# Altium PCB 60V_Ind.PcbDoc
Units mil, origin at the board's own origin, x right, y up, seen from the top; angles counter-clockwise.
Board outline 1600 x 800 mil, 2 copper layers (Top Layer, Bottom Layer), stack 58.8 mil thick; 7 components, 4 nets, 17 pads, 0 vias.
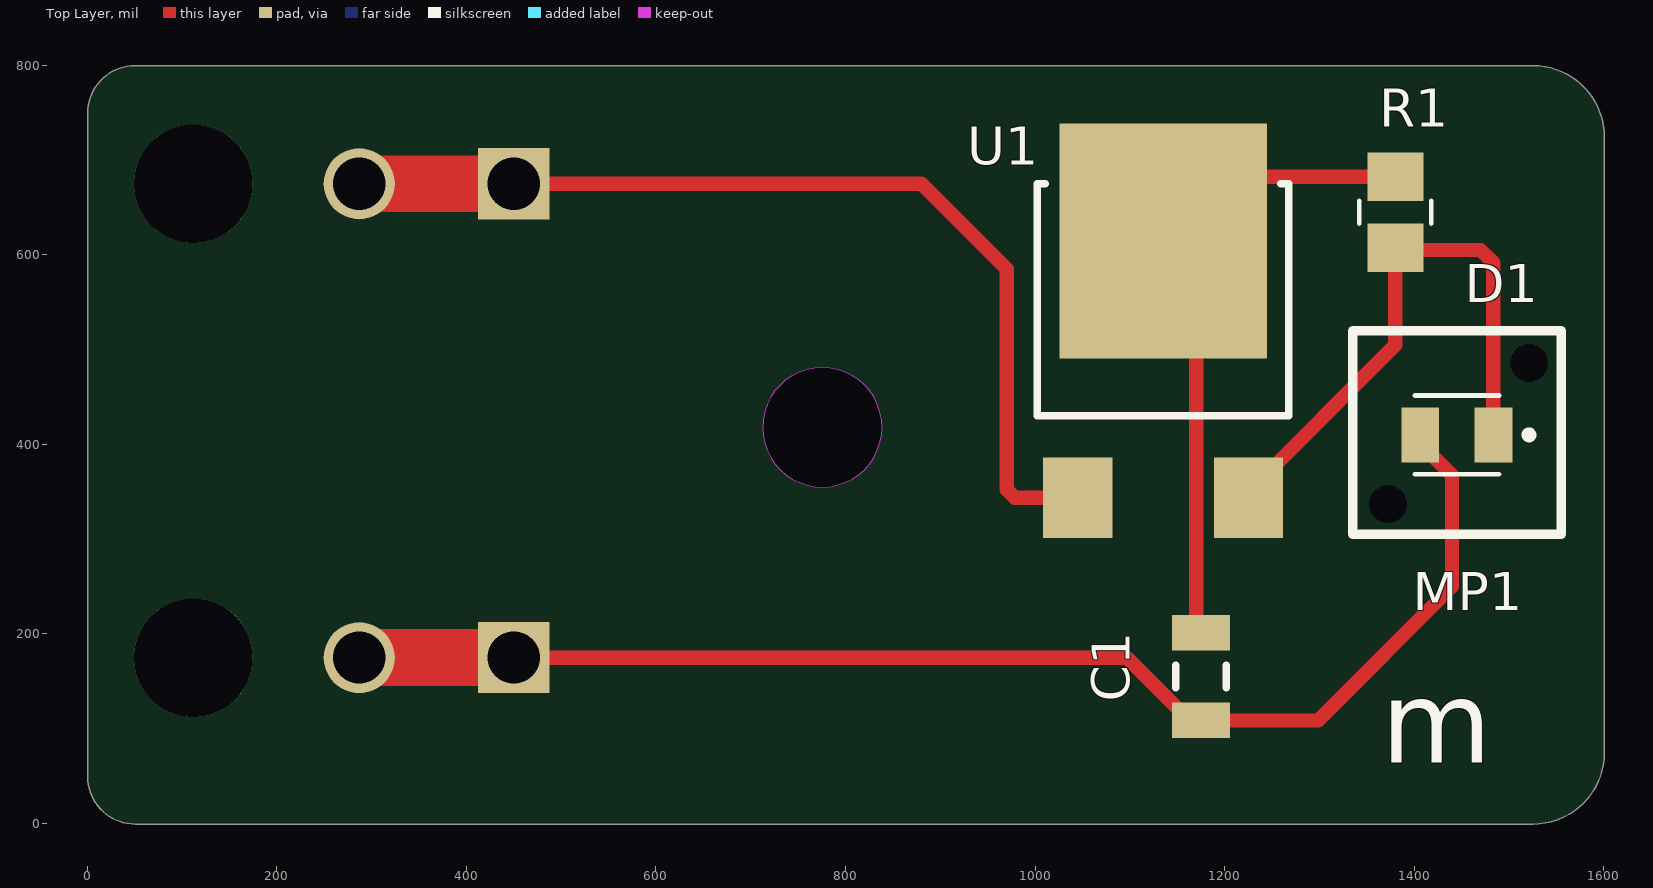
[diagram p0: Top Layer view]
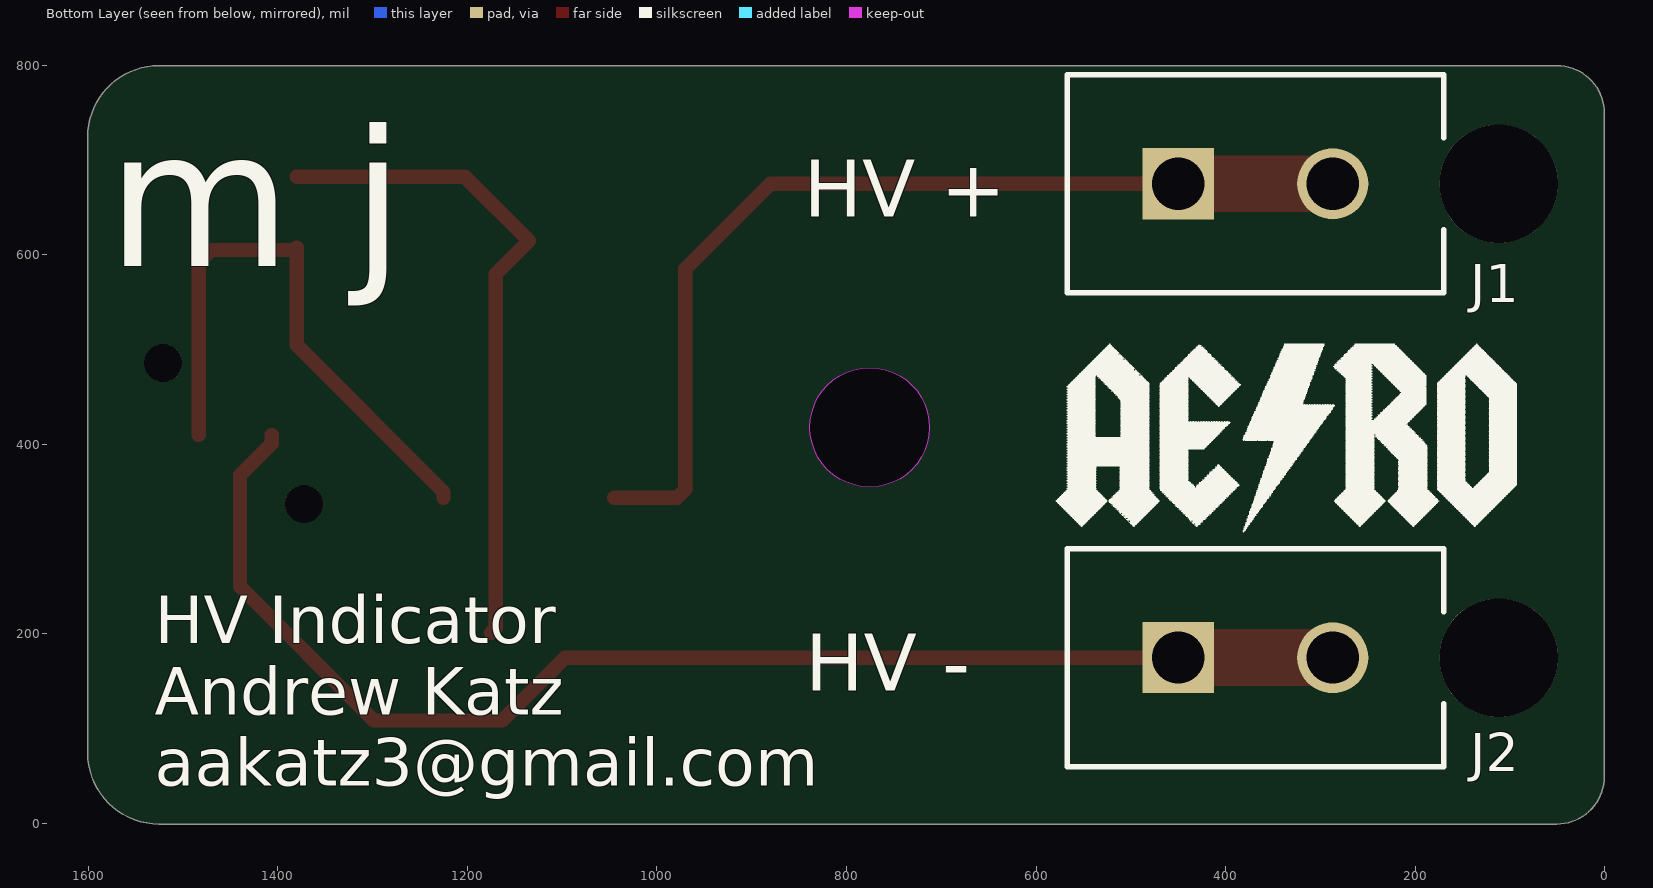
[diagram p1: Bottom Layer view, seen from below]
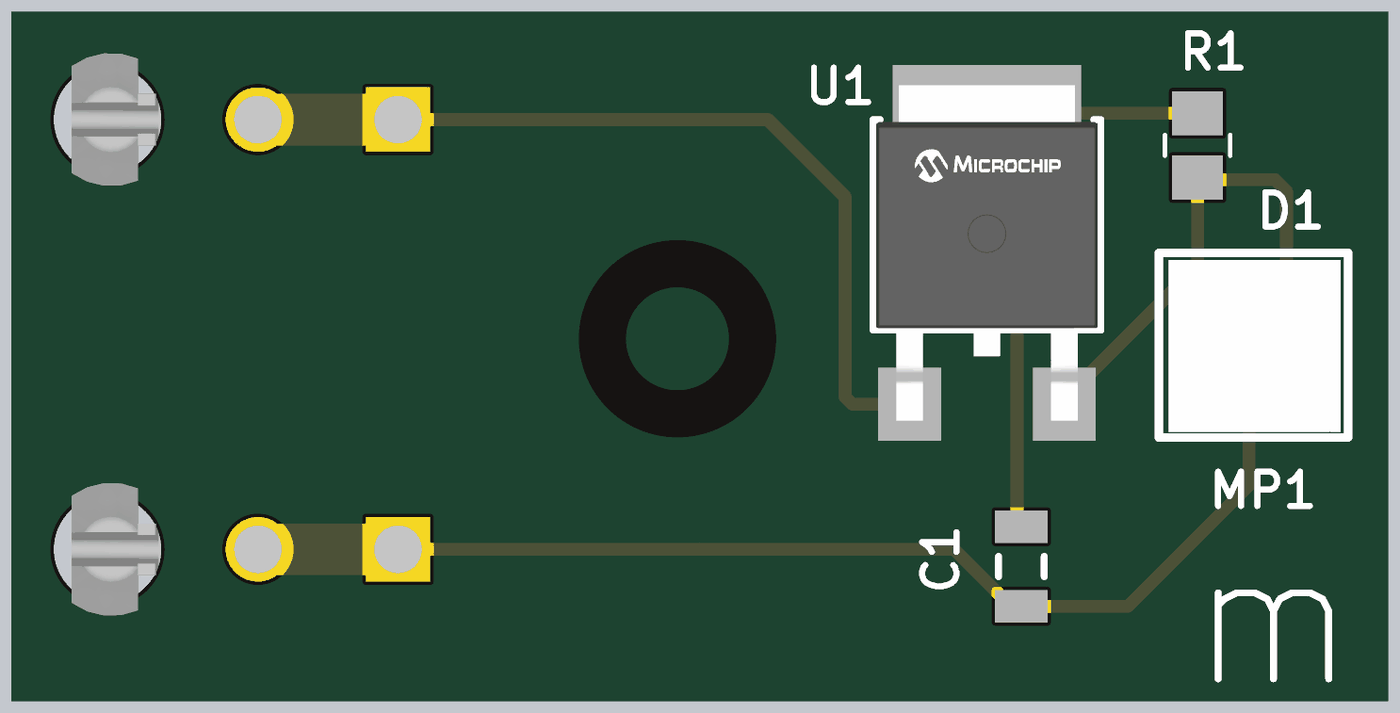
[diagram p2: 3D render of the assembled board from above, using the file's embedded part models]

## Layer stack, top to bottom
Top Solder: solder mask 1, SM-001, Dk 4
Top Layer: signal copper 1.4
Dielectric 1: core 56, FR-4, Dk 4.2
Bottom Layer: signal copper 1.4
Bottom Solder: solder mask 1, SM-001, Dk 4

## Board outline
50.5,-0.5 cw(c50.5,49.5) 0.5,49.5 0.5,749.5 cw(c50.5,749.5) 50.5,799.5 1525.5,799.5 cw(c1525.5,724.5) 1600.5,724.5 1600.5,74.5 cw(c1525.5,74.5) 1525.5,-0.5
cut-out: 712.51,418.01 ccw(c775.5,418.01) 775.5,355.02 ccw(c775.5,418.01) 838.49,418.01 ccw(c775.5,418.01) 775.5,481 ccw(c775.5,418.01)

## Design rules (kind name [scope] priority, off if disabled: settings)
Clearance [All] p1: gap=10 ignorepadtopadclearanceinfootprint=FALSE except(0: Arc-Hole Track-Hole SMDPad-Hole THPad-Hole Via-Hole Fill-Hole Poly-Hole Region-Hole Text-Hole)
ComponentClearance [All] p1: gap=3 collisioncheckmode=3 verticalgap=2 showdistances=TRUE
HoleSize [All] p1: absolutevalues=TRUE maxlimit=500 minlimit=1 maxpercent=80.000 minpercent=20.000
PasteMaskExpansion PasteMaskExpansion_1 [IsVia or IsThruPin] p1: expansion=-1000
PasteMaskExpansion [Not IsVia and Not IsThruPin] p2: expansion=0
PolygonConnect [All] p1: connectstyle=Relief reliefconductorwidth=10 reliefentries=4 polygonreliefangle="90 Angle" airgapwidth=10
RoutingVias [All] p1: holewidth=28 width=50 viastyle="Through Hole" minholewidth=15 minwidth=30 maxholewidth=28 maxwidth=50
SilkToSilkClearance [All] p1: silktosilkclearance=5
SilkToSolderMaskClearance [IsPad] p1: minsilkscreentomaskgap=5 clearancetoexposedcopper=TRUE
SolderMaskExpansion via [IsVia] p1: expansion=4 istentingtop=TRUE
SolderMaskExpansion [All] p2: expansion=4 istentingtop=FALSE
Width [All] p1: maxlimit=60 minlimit=10 preferedwidth=10 minimp=50.000000 maximp=50.000000 favimp=50.000000
25 further rules are at their usual default settings.

## Components (designator, comment, footprint, x,y, rotation, side; value= is the part's Value field where it differs from the comment)
C1 "C2012X7S2A105K125AB" CAPC2013X145X20ML20 1175,155 r270 top
D1 "SM0805HCL" LEDC2012X135N_SM0805UGC(Primary) 1445,410 r180 top
J1 "1-770872-0" CON2_1X2_P163_VM 450,675 r180 bottom value=Value
J2 "1-770872-0" CON2_1X2_P163_VM 450,175 r180 bottom value=Value
MP1 "LPA-C011301S-10" LPA-C011301S-10 1450,415 r0 top
R1 "40.2 Ohms" 0805_RES 1380,645 r90 top value=40.2
U1 "LR8K4-G" Microchip_C04-189_MFG 1135,520 r0 top

## Footprints (in the part's own frame and the unit in brackets; to place one, negate y for a bottom-side part, rotate by r counter-clockwise, add the part's x,y. Pads: shape width x height; smd on the part's side, far side on the other; paste and mask are expansions set on the pad)
0805_RES [mm]
  rect 1.3x1.5 smd: 1(-0.95,0) 2(0.95,0)
  silkscreen extent -0.3,-0.97 0.3,0.97, body extent -1.09,-0.7 1.09,0.7, height 1.1
CAPC2013X145X20ML20 [mm] "Chip Capacitor, 2-Leads, Body 2.20x1.45mm, IPC Low Density"
  rect 0.95x1.55 smd: 1(-1.175,0) 2(1.175,0)
  silkscreen extent -0.3,-0.67 0.3,0.67, body extent -1.1,-0.72 1.1,0.72, height 1.45
CON2_1X2_P163_VM [mil]
  rect 75x75 hole 55: 1(0,0)
  round 75 hole 55: 2(162.99,0)
  round 125 hole 125 unplated: 3(338,0)
  silkscreen extent -117,-115 280,115, body extent -159,-140 380,110, height 566
LEDC2012X135N_SM0805UGC(Primary) [mm]
  rect 1.01x1.47 smd: A(-0.98,0) C(0.98,0)
  silkscreen extent -2.03,-1.05 1.13,1.05, body extent -1,-0.62 1,0.62, height 1.12
LPA-C011301S-10 [mm]
  round 1 hole 1.016 unplated paste-2.54 mask-2.54: M1(-1.973,-1.975) M1(1.8,1.8)
  silkscreen extent -2.92,-2.79 2.67,2.67, body extent -2.63,-2.63 2.45,2.45, height 14.65
Microchip_C04-189_MFG [mil]
  rect 73x85 smd paste+0 mask+0: 1(-90,-176.25) 3(90,-176.25)
  rect 219x248 smd paste+0 mask+0: 4(0,94.75)
  silkscreen extent -132,-90 132,155, body extent -136,-223 136,223, height 10

## Part data
C1: library part CMP-2000-05454-1, "Chip Capacitor, 1 uF, +/- 10%, 100 V, -55 to 125 degC, 0805 (2012 Metric), RoHS, Tape and Reel", Capacitance=1µF, Manufacturer=TDK, Operating Temperature=-55degC~125degC, Package / Case=0805(2012Metric), Package Description="2-Pin Surface Mount Device, Body 2 x 1.25 mm", Package Reference=805, PCN Part Number=MLCCPartNumberChange30/Nov/2012, Ratings=-, Standard Package=1, Temperature Coefficient=X7S, Tolerance=±10%, Voltage - Rated=100V, Applications=GeneralPurpose, Catalog Drawings=CSERIES_2012-0805_1.45, Category=Capacitors, Datasheet URL=https://datasheet.ciiva.com/24216/c2012x7s2a105k125ab-265082-24216433.pdf, Datasheet Version=Sep-13, Family=CeramicCapacitors, Featured Product=Compact,High-CapacitanceMultilayerCeramicChipCapacitorsMidVoltageX7S-100VMLCCsC-SeriesMidVoltageMLCCs, Features=-, Height - Seated (Max)=-, Kits=445-9009-KIT-ND-KITCAPCERHICAP100V-630VSMDSAMPLEKIT1008-ND-KITCAPCERMLCC100V-630V, Lead Spacing=-, Lead Style=-, Manufacturer URL=http://www.tdk.com/, Mounting Type=SurfaceMount,MLCC, Online Catalog=CSeries,MidVoltage, Other Names=445-5205-1, Packaging=CutTape(CT), Product Training Modules=SEAT,CCV,andTVCLDesignToolsCSeriesMidVoltageCapacitorsFamilyGuidetoReplacinganElectrolyticCapacitorwithanMLCC, RoHS Information=RoHSCertificate-MLCC, Series=C, Size / Dimension="0.079\"Lx0.049\"W(2.00mmx1.25mm)", Thickness (Max)="0.053\"(1.35mm)"
D1: "Red 631nm LED Indication - Discrete 1.9V 0805 (2012 Metric)", Supplier Part Number 1=492-2281-1-ND, Supplier 1=Digi-Key
J1 J2: "Connector Header Through Hole 2 position 0.163\" (4.14mm)", Built_By=EMA_UL_Team, Copyright="Copyright (C) 2018 Accelerated Designs. All rights reserved", Manufacturer_Part_Number=1-770872-0, RefDes=RefDes, Type=DEV, Vendor="TE Connectivity"
MP1: "Light Pipe Single Clear Rigid Round with Flat Top, 3mm Board Mount, Press Fit", Supplier Part Number 1=67-1833-ND, Supplier 1=Digi-Key
R1: library part "RES 0805 40.2 1%", "Resistor Surface Mount, 40.2 Ohms, 0805 Footprint, 1% Tolerance 0.125W", Manufacturer=Various, PCB Package=0805, Power_Rating=0.125W, Tolerance=1%, Description in Visual="Res SMT 40.2 0805  1%  0.125W", Manufacturer P/N=Various, P/N="RES 0805 40.2 1%", Tol=1%, Val=40.2
U1: "Linear Voltage Regulator IC Positive Adjustable 1 Output  10mA TO-252, (D-Pak)", Supplier Part Number 1=LR8K4-GCT-ND, Supplier 1=Digi-Key

## Nets (pads, with @x,y where several pads share a name; then routed paths per layer and width w, separated by ;. In a path a pad name is that pad's centre, name@x,y a point inside that pad or via, vN(x,y) a via of type N, cw(c..) or ccw(c..) an arc to the next point about the centre after c; other vN are vias at no path point)
ADJ: D1.A R1.1 U1.3 | length 619.8
  Top Layer w15: U1.3 1225,349.75 1380,504.75 R1.1 1382.6,605 1470,605 1483.37,591.63 1483.37,410.22 D1.A
GND: C1.2 D1.C J2.1 J2.2 | length 1412.8
  Top Layer w15: J2.1 1096.93,175 1163.19,108.74 C1.2 1298.74,108.74 1439.97,249.97 1439.97,367.39 1406.42,400.94 D1.C
  Top Layer w60: J2.2 J2.1
HV+: J1.1 J1.2 U1.1 | length 1031.4
  Top Layer w15: J1.1 880,675 970,585 970,352.54 978.79,343.75 U1.1
  Top Layer w60: J1.2 J1.1
VOUT: C1.1 R1.2 U1.4 | length 703.1
  Top Layer w15: C1.1 1170,206.26 1170,579.75 U1.4 1202.65,682.4 R1.2
pads on no net: J1.3 J2.3 MP1.M1

## Silkscreen, mask and mechanical layers (free items; w line width, h text height)
Top Overlay:
  text "m" at 1365,35 h150
Bottom Overlay:
  drawing of 5 lines, arcs and shapes, not listed
  text "HV +" at 845,640 h60
  text "m j" at 1580,540 h250
  text "HV -" at 843.53,140 h60
  text "HV Indicator / Andrew Katz / aakatz3@gmail.com" at 1530,40 h50
Top Solder:
  circle w55: c775,420 r87.32
Bottom Solder:
  circle w55: c775,420 r87.32
Board:
  circle w0.5: c1524.91,482.57 r19.68
  circle w0.5: c1376.09,333.76 r19.68
  circle w0.5: c112.7,174.5 r62.6
  circle w0.5: c287.51,174.5 r27.56
  circle w0.5: c450.5,174.5 r27.56
  circle w0.5: c112.7,674.5 r62.6
  circle w0.5: c450.5,674.5 r27.56
  circle w0.5: c287.51,674.5 r27.56
  circle w0.5: c775.5,418.01 r62.99
  lines w0.5: 0.5,49.5 ccw(c50.5,49.5) 50.5,-0.5 1525.5,-0.5 ccw(c1525.5,74.5) 1600.5,74.5 1600.5,724.5 ccw(c1525.5,724.5) 1525.5,799.5 50.5,799.5 ccw(c50.5,749.5) 0.5,749.5 0.5,49.5

## Text inside footprints (layer, text, board x,y; h text height)
R1: Mechanical 3 "2. SS 102512, ADDED SILKSCREEN." at 1346,578 h1 r90; Mechanical 3 "LOCATION: SURFACEMOUNT2LEAD.PCBLIB" at 1342,578 h1 r90; Mechanical 3 "HISTORY: MT 021711, OLDER FOOTPRINT. STANDARD MAX HEIGHT 1.1MM" at 1344,578 h1 r90